# Allegro board LEXICON_GLOVE_1.brd
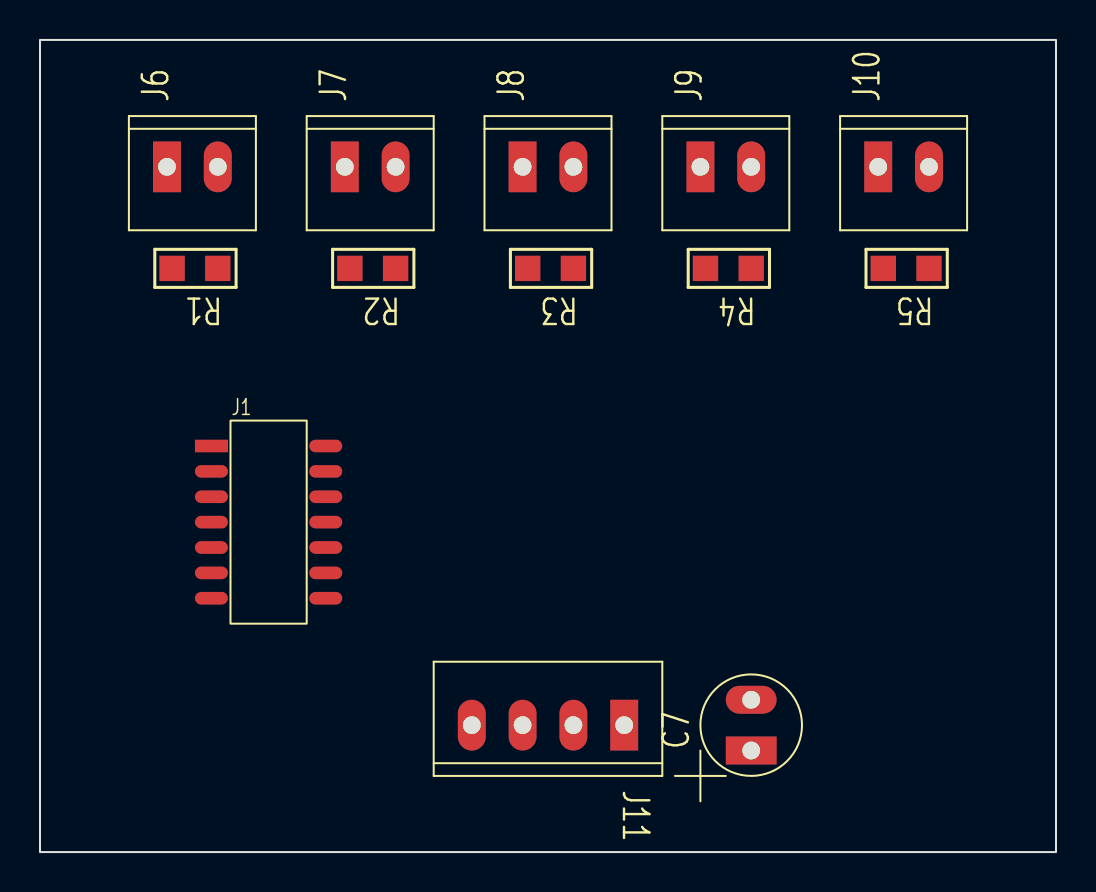
[diagram p0: board, top side]
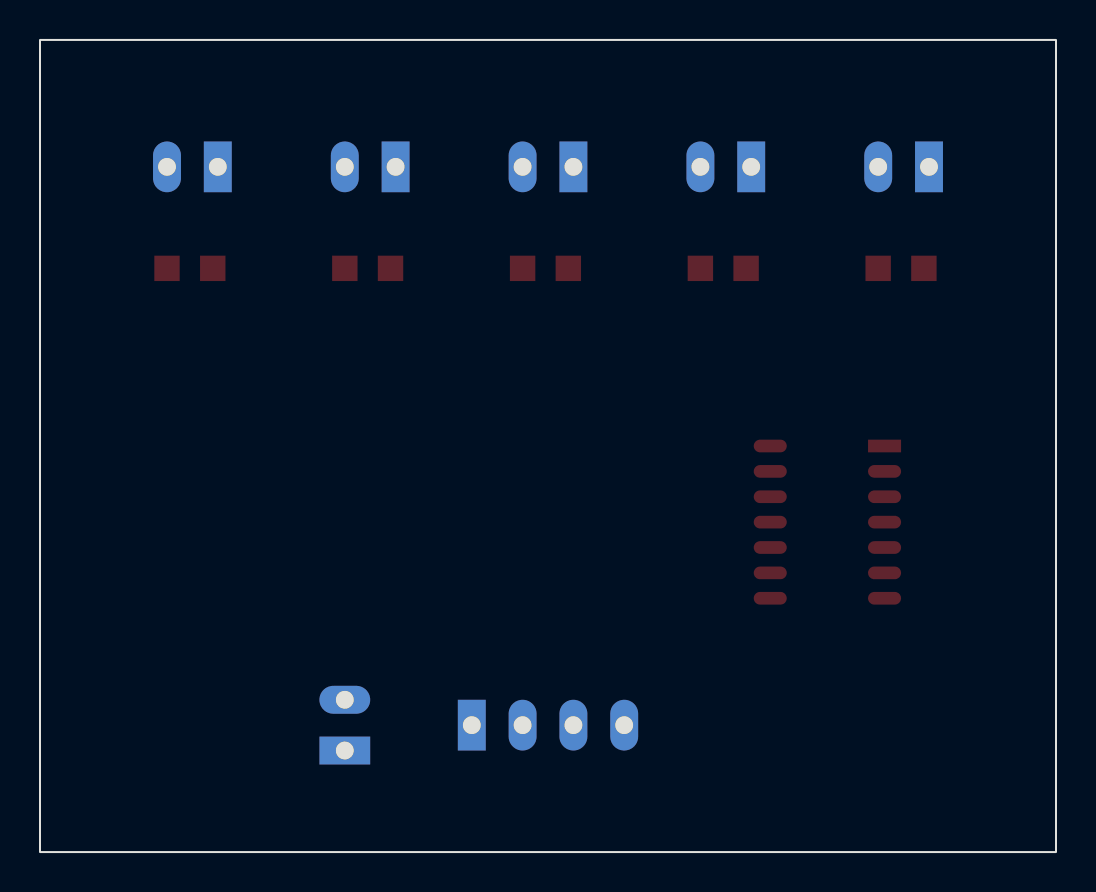
[diagram p1: board, bottom side, seen from below]

Outline 50.8 x 40.64 mm; copper layers: TOP, BOTTOM. Coordinates in mm from the lower left corner of the outline.
Outline path: rectangle 0,0 50.8,40.64

## Design rules (mm)
constraint set DEFAULT: min track width 0.254

## Placement (name value [footprint] x y rotation side)
C7  10u  [GU-CAPCYL100]  35.56 5.08 90 top
J1  MCP3428  [GU-SOIC14]  11.43 16.51 0 top
J6  F1  [GU-MOLEX2]  6.35 34.29 90 top
J7  F2  [GU-MOLEX2]  15.24 34.29 90 top
J8  F3  [GU-MOLEX2]  24.13 34.29 90 top
J9  F4  [GU-MOLEX2]  33.02 34.29 90 top
J10  F5  [GU-MOLEX2]  41.91 34.29 90 top
J11  PI  [GU-MOLEX4]  29.21 6.35 270 top
R1  33k  [GU-R0805]  8.89 29.21 180 top
R2  33k  [GU-R0805]  17.78 29.21 180 top
R3  33k  [GU-R0805]  26.67 29.21 180 top
R4  33k  [GU-R0805]  35.56 29.21 180 top
R5  33k  [GU-R0805]  44.45 29.21 180 top

## Library data of the parts
C7 = C
J1 = CON14C
J6-J10 = CON2
J11 = CON4
R1-R5 = RESISTOR

## Footprints (pads in the part's own frame, mm; a bottom-side part is the same pattern mirrored in y, then rotated)
GU-CAPCYL100
  rect 1.397x2.54 hole 0.889: 1(0,0)
  oval 1.397x2.54 hole 0.889: 2(2.54,0)
GU-MOLEX2
  rect 2.54x1.397 hole 0.889: 1(0,0)
  oval 2.54x1.397 hole 0.889: 2(0,-2.54)
GU-MOLEX4
  rect 2.54x1.397 hole 0.889: 1(0,0)
  oval 2.54x1.397 hole 0.889: 2(0,-2.54) 3(0,-5.08) 4(0,-7.62)
GU-R0805
  rect 1.27x1.27 smd: 1(0,0) 2(2.286,0)
GU-SOIC14
  rect 1.651x0.635 smd: 1(-2.857,3.81)
  oval 1.651x0.635 smd: 2(-2.857,2.54) 3(-2.857,1.27) 4(-2.857,0) 5(-2.857,-1.27) 6(-2.857,-2.54) 7(-2.857,-3.81) 8(2.857,-3.81) 9(2.857,-2.54) 10(2.857,-1.27) 11(2.857,0) 12(2.857,1.27) 13(2.857,2.54) 14(2.857,3.81)

## Nets
3V3: C7.1 J1.6 J1.9 J1.10 J6.1 J7.1 J8.1 J9.1 J10.1 J11.1
GND: C7.2 J1.2 J1.4 J1.5 J1.12 J1.14 J11.2 R1.2 R2.2 R3.2 R4.2 R5.2
FING1: J1.1
FING2: J1.3
FING3: J1.11
FING4: J1.13
SCL: J1.8 J11.4
SDA: J1.7 J11.3
N00544: J6.2 R1.1
N00572: J7.2 R2.1
N00597: J8.2 R3.1
N00622: J9.2 R4.1
N00734: J10.2 R5.1
